# Allegro board L151_SHT30_V10A.brd
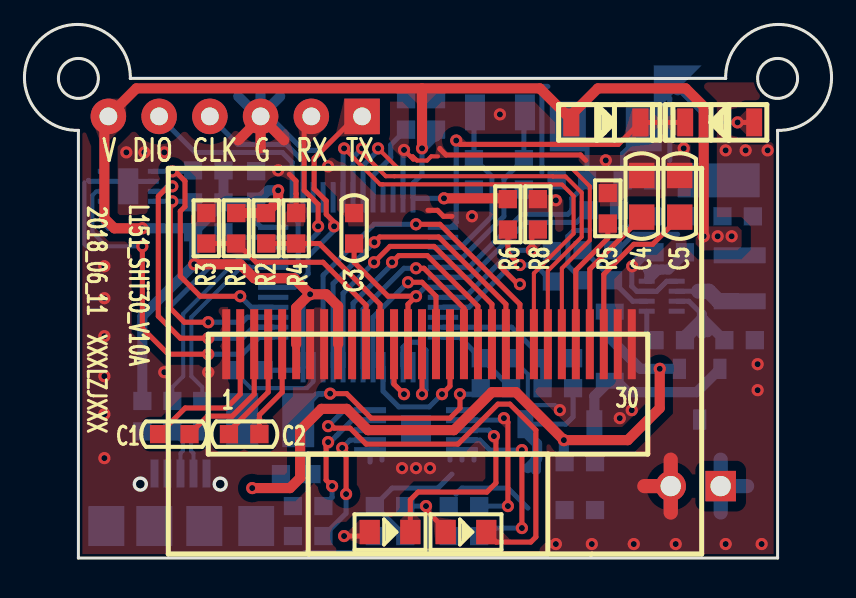
[diagram p0: board, top side]
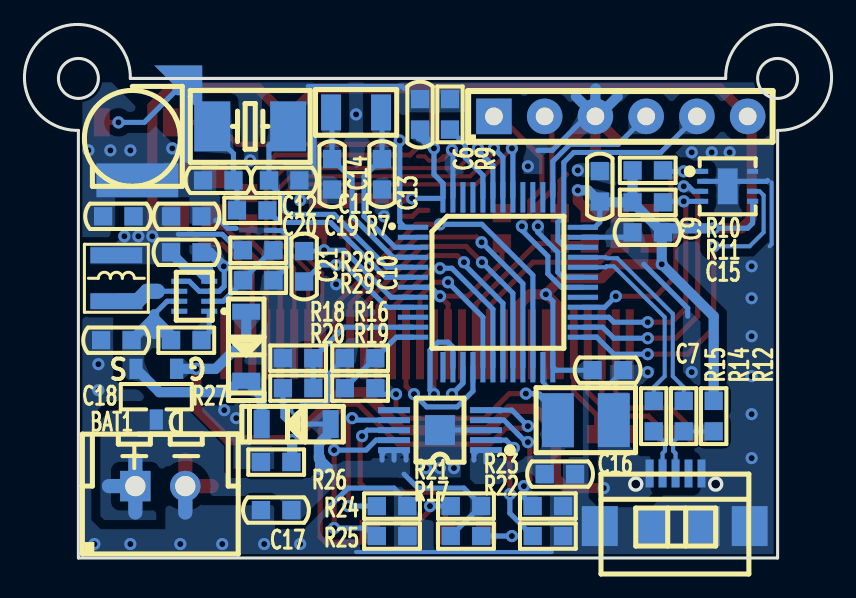
[diagram p1: board, bottom side, seen from below]

Outline 40.4 x 26.7 mm; copper layers: TOP, BOTTOM. Coordinates in mm from the lower left corner of the outline.
Outline path: circle c2.7,24 r1 ; circle c37.7,24 r1 ; 2.7,21.4 2.7,0 37.7,0 37.7,21.4 arc(39.63,25.92) 35.1,24 5.3,24 arc(0.78,25.92) 2.7,21.4

## Design rules (mm)
constraint set DEFAULT: min track width 0.203, pair gap 0.203
net group DP1: nets USB_D+ USB_D-
net group DP2: nets USB_DM USB_DP

## Placement (name value [footprint] x y rotation side)
BAT1  BATTERY  [XHB-2A]  33.6 3.6 180 bottom
C1  1uF_25V  [CC0603]  7.5 6.2 180 top
C2  1uF_25V  [CC0603]  11 6.2 0 top
C3  0.1uF_50V  [CC0603]  16.5 16.5 90 top
C4  10uF_25V  [CC0805]  30.9 18.1 90 top
C5  10uF_25V  [CC0805]  32.8 18.1 90 top
C6  0.1uF_50V  [CC0603]  20.6 22.2 270 bottom
C7  0.1uF_50V  [CC0603]  11.2 9.4 0 bottom
C9  0.1uF_50V  [CC0603]  11.6 18.6 270 bottom
C10  0.1uF_50V  [CC0603]  26.4 14.6 270 bottom
C11  20pF_50V  [CC0603]  27.4 18.9 0 bottom
C12  20pF_50V  [CC0603]  30.7 18.9 180 bottom
C13  12pF_50V  [CC0603]  22.5 19.2 90 bottom
C14  12pF_50V  [CC0603]  25 19.2 90 bottom
C15  0.1uF_50V  [CC0603]  9.2 16.3 0 bottom
C16  10uF_10V  [CC0603]  13.6 4.2 180 bottom
C17  10uF_10V  [CC0603]  27.8 2.4 0 bottom
C18  10uF_10V  [CC0603]  35.8 10.9 0 bottom
C19  10uF_10V  [CC0603]  32.3 17.1 180 bottom
C20  10uF_10V  [CC0603]  35.7 17.1 0 bottom
C21  0.1uF_50V  [CC0603]  32.3 15.3 180 bottom
D1  1N4148W-TP  [SOD-123]  27.5 21.8 0 top
D2  1N4148W-TP  [SOD-123]  36.4 21.8 180 top
D3  LED_RED  [LED0805]  18.3 1.3 0 top
D4  LED_GREEN  [LED0805]  22.1 1.3 0 top
D5  LMBR130FT1G  [SOD-123]  25.2 6.7 0 bottom
D6  LMBR130FT1G  [SOD-123]  29.3 12.2 270 bottom
F1  SMD1210-6V2A  [SMD-1210]  12.3 6.9 0 bottom
J2  -  [HEADER6X1_2R54]  16.9 22.1 180 bottom
L1  SWPA3015S2R2NT  [L3015]  35.8 14 90 bottom
NOREF  -  []  2.7 0 90 top
NOREF#2  -  []  0 24 0 top
Q1  AO3401A  [SOT23_GSD]  33.8 8.2 0 bottom
R1  10K  [RC0603]  10.6 16.5 90 top
R2  10K  [RC0603]  12.1 16.5 90 top
R3  10K/NI  [RC0603]  9.1 16.5 270 top
R4  10K/NI  [RC0603]  13.6 16.5 270 top
R5  760K  [RC0603]  29.2 17.5 270 top
R6  0R  [RC0603]  24.2 17.2 90 top
R7  390R  [RC0603]  29 17.4 180 bottom
R8  0R  [RC0603]  25.7 17.2 90 top
R9  10K  [RC0603]  19.1 22.2 90 bottom
R10  4.7K  [RC0603]  9.2 19.4 0 bottom
R11  4.7K  [RC0603]  9.2 17.8 0 bottom
R12  1.5K  [RC0603]  5.9 7.1 270 bottom
R14  22R  [RC0603]  7.4 7.1 270 bottom
R15  22R  [RC0603]  8.9 7.1 270 bottom
R16  200K  [RC0603]  23.6 10 180 bottom
R17  10K  [RC0603]  18.3 1.1 0 bottom
R18  200K  [RC0603]  26.7 10 180 bottom
R19  200K  [RC0603]  23.6 8.5 180 bottom
R20  200K  [RC0603]  26.7 8.5 0 bottom
R21  10K  [RC0603]  18.3 2.6 180 bottom
R22  540R  [RC0603]  14.2 1.1 180 bottom
R23  2K  [RC0603]  14.2 2.6 180 bottom
R24  10K  [RC0603]  22 2.6 180 bottom
R25  10K  [RC0603]  22 1.1 180 bottom
R26  100K  [RC0603]  27.8 4.8 0 bottom
R27  10K  [RC0603]  32.3 10.9 180 bottom
R28  200K  [RC0603]  28.7 15.4 180 bottom
R29  44.2K  [RC0603]  28.7 13.9 180 bottom
U1  -  [OLED_0R96]  7.2 0.2 0 top
U2  STM32F103C8T6  [LQFP-48]  16.7 13.8 180 bottom
U3  BATTERY_XH414  [BAT-XH414HG]  35 21 180 bottom
U4  SHT30-DIS-B  [DFN-8]  5.2 18.6 180 bottom
U6  BQ24090DGQR  [HVSSOP-10]  19.6 6.4 90 bottom
U7  MP2162GQH-Z  [QFN-8]  31.9 13.1 0 bottom
USB1  -  [USB-MICRO]  7.8 4.3 180 bottom
X1  X50328MSD2GC  [X-2P-5R0X3R2-SMD]  29.1 21.6 180 bottom
X2  XTAL_32768Hz_3215  [X-2P-3R2X1R5-SMD]  23.8 22.3 180 bottom

## Library data of the parts
BAT1 U3 = BATTERY
C1-C7 C9 C10 C16-C20 = CAP NP_2
C11-C15 C21 = CAP NP
D1 D2 = DIODE13_7
D3 D4 = LED_4
D5 D6 = DIODE13_0
F1 = FUSE
J2 = CONN RCPT 6
L1 = IND_BEAD_0805_600OHM_1
Q1 = MOS-P
R1-R12 R14-R29 = R_Generic
U1 = OLED_0
U2 = STM32F103C8T6
U4 = SHT30-DIS-B
U6 = BQ24090
U7 = MP2162GQH-Z
USB1 = USB-MICRO
X1 X2 = XTAL_5032_0

## Footprints (pads in the part's own frame, mm; a bottom-side part is the same pattern mirrored in y, then rotated)
BAT-XH414HG
  custom 2.4x2.4 smd: 1(2.3,2.45)
  rect 4.1x1.7 smd: 2(0.25,-2.1)
CC0603
  rect 0.914x0.914 smd: 1(-0.762,0) 2(0.762,0)
CC0805
  rect 1.27x1.27 smd: 1(-1.041,0) 2(1.041,0)
DFN-8
  rect 0.55x0.25 smd: 1(-1.25,0.75) 2(-1.25,0.25) 3(-1.25,-0.25) 4(-1.25,-0.75) 5(1.25,-0.75) 6(1.25,-0.25) 7(1.25,0.25) 8(1.25,0.75)
  rect 1x1.8 smd: 9(0,0)
HEADER6X1_2R54
  rect 1.778x1.778 hole 0.889: 1(0,0)
  round 1.778 hole 0.889: 2(2.54,0) 3(5.08,0) 4(7.62,0) 5(10.16,0) 6(12.7,0)
HVSSOP-10
  rect 0.3x1.6 smd: 1(-1,-2.3) 2(-0.5,-2.3) 3(0,-2.3) 4(0.5,-2.3) 5(1,-2.3) 6(1,2.3) 7(0.5,2.3) 8(0,2.3) 9(-0.5,2.3) 10(-1,2.3)
  rect 1.5x1.5 smd: 11(0,0)
L3015
  rect 0.8x2.6 smd: 1(-1.15,0) 2(1.15,0)
LED0805
  rect 1.016x1.219 smd: 1(-1.016,0) 2(1.016,0)
LQFP-48
  rect 1.52x0.25 smd: 1(-4.25,2.75) 2(-4.25,2.25) 3(-4.25,1.75) 4(-4.25,1.25) 5(-4.25,0.75) 6(-4.25,0.25) 7(-4.25,-0.25) 8(-4.25,-0.75) 9(-4.25,-1.25) 10(-4.25,-1.75) 11(-4.25,-2.25) 12(-4.25,-2.75) 25(4.25,-2.75) 26(4.25,-2.25) 27(4.25,-1.75) 28(4.25,-1.25) 29(4.25,-0.75) 30(4.25,-0.25) 31(4.25,0.25) 32(4.25,0.75) 33(4.25,1.25) 34(4.25,1.75) 35(4.25,2.25) 36(4.25,2.75)
  rect 0.25x1.52 smd: 13(-2.75,-4.25) 14(-2.25,-4.25) 15(-1.75,-4.25) 16(-1.25,-4.25) 17(-0.75,-4.25) 18(-0.25,-4.25) 19(0.25,-4.25) 20(0.75,-4.25) 21(1.25,-4.25) 22(1.75,-4.25) 23(2.25,-4.25) 24(2.75,-4.25) 37(2.75,4.25) 38(2.25,4.25) 39(1.75,4.25) 40(1.25,4.25) 41(0.75,4.25) 42(0.25,4.25) 43(-0.25,4.25) 44(-0.75,4.25) 45(-1.25,4.25) 46(-1.75,4.25) 47(-2.25,4.25) 48(-2.75,4.25)
OLED_0R96
  rect 0.4x3.5 smd: 1(2.9,10.5) 2(3.6,10.5) 3(4.3,10.5) 4(5,10.5) 5(5.7,10.5) 6(6.4,10.5) 7(7.1,10.5) 8(7.8,10.5) 9(8.5,10.5) 10(9.2,10.5) 11(9.9,10.5) 12(10.6,10.5) 13(11.3,10.5) 14(12,10.5) 15(12.7,10.5) 16(13.4,10.5) 17(14.1,10.5) 18(14.8,10.5) 19(15.5,10.5) 20(16.2,10.5) 21(16.9,10.5) 22(17.6,10.5) 23(18.3,10.5) 24(19,10.5) 25(19.7,10.5) 26(20.4,10.5) 27(21.1,10.5) 28(21.8,10.5) 29(22.5,10.5) 30(23.2,10.5)
QFN-8
  rect 0.8x0.25 smd: 1(-0.75,0.75) 2(-0.75,0.25) 3(-0.75,-0.25) 4(-0.75,-0.75) 5(0.75,-0.75) 6(0.75,-0.25) 7(0.75,0.25) 8(0.75,0.75)
RC0603
  rect 0.914x0.914 smd: 1(-0.762,0) 2(0.762,0)
SMD-1210
  rect 1.6x2.7 smd: 1(-1.4,0) 2(1.4,0)
SOD-123
  rect 0.8x1.4 smd: 1(-0.127,0) 2(3.327,0)
SOT23_GSD
  rect 0.66x1.016 smd: 1(-1.016,-1.27) 2(1.016,-1.27) 3(0,1.27)
USB-MICRO
  rect 0.4x1.4 smd: 1(-1.31,-0.07) 2(-0.66,-0.07) 3(-0.01,-0.07) 4(0.64,-0.07) 5(1.29,-0.07)
  rect 1.8x2 smd: 6(-3.8,-2.7) 7(-1.2,-2.7) 8(1.3,-2.7) 9(3.7,-2.7)
X-2P-3R2X1R5-SMD
  rect 1x1.8 smd: 1(-1.25,0) 2(1.25,0)
X-2P-5R0X3R2-SMD
  rect 1.8x2.5 smd: 1(-1.9,0) 2(1.9,0)
XHB-2A
  rect 1.524x1.524 hole 1.016: 1(-1.25,0)
  round 1.524 hole 1.016: 2(1.25,0)

## Nets
GND: BAT1.2 C3.2 C4.2 C5.2 C6.1 C7.1 C9.1 C11.1 C12.1 C13.1 C14.1 C15.2 C16.2 C17.2 C18.2 C19.2 C20.2 C21.2 J2.3 R3.1 R4.1 R5.1 R8.2 R9.2 R16.1 R18.1 R22.2 R23.2 R24.2 R25.2 R26.2 R29.2 U1.1 U1.7 U1.8(VSS) U1.29 U1.30 U2.23 U2.35 U2.47(VSS_3) U3.2 U4.2 U4.7 U4.8(VSS) U4.9 U6.3(VSS) U6.11 U7.3 U7.5 USB1.5 USB1.6 USB1.7 USB1.8 USB1.9
VBAT: D1.2(CATHODE) D2.2(CATHODE) U2.1
VCC_3.3V: C6.2 C7.2 C9.2 C15.1 C19.1 C20.1 C21.1 D1.1 J2.6 L1.2(B) R1.2 R2.2 R6.2 R10.2 R11.2 R12.1 R28.1 U1.6 U1.9 U2.24 U2.36 U2.48 U4.5 U7.4
VCC_BAT: BAT1.1 C17.1 D5.1 Q1.3 R17.2 R20.2 R21.2 U6.10
VCC_DCDC: C18.1 D5.2 D6.2 Q1.2(S) R27.1 U7.7(VIN)
VCC_USB: D6.1 F1.1 Q1.1 R26.1 USB1.1(VBUS)
VDDA: C10.2 R6.1 U2.9
VSSA: C10.1 R8.1 U2.8
ADC_BAT: R18.2 R20.1 U2.11
ADC_USB: R16.2 R19.1 U2.12
BAT_#CHG: D3.2(CATHODE) U6.8
BAT_#PG: D4.2(CATHODE) U6.5
BOOT0: R9.1 U2.44
BS1: R1.1 R3.2 U1.11
BS2: R2.1 R4.2 U1.12
OLED_CS: U1.13 U2.15
OLED_D0: U1.18 U2.18
OLED_D1: U1.19 U2.19
OLED_D2: U1.20 U2.20
OLED_D3: U1.21 U2.21
OLED_D4: U1.22 U2.22
OLED_D5: U1.23 U2.41
OLED_D6: U1.24 U2.42
OLED_D7: U1.25 U2.43
OLED_DC: U1.15 U2.14
OLED_RD: U1.17 U2.16
OLED_RW: U1.16 U2.17
OSC32_IN: C13.2 U2.3 X2.2
OSC32_OUT: C14.2 U2.4 X2.1
OSC_IN: C11.2 U2.5 X1.2
OSC_OUT: R7.2 U2.6
RESET: C3.1 U1.14 U2.7
SHT30_ALERT: U2.26 U4.3
SHT30_RST: U2.25 U4.6
SHT30_SCL: R11.1 U2.27 U4.4
SHT30_SDA: R10.1 U2.28 U4.1
SWCLK: J2.4 U2.37
SWDIO: J2.5 U2.34
USART1_RX: J2.2 U2.31
USART1_TX: J2.1 U2.30
USB_D+: R12.2 R14.2 USB1.3
USB_D-: R15.2 USB1.2
USB_DM: R15.1 U2.32
USB_DP: R14.1 U2.33
N16868433: C1.2 U1.2
N16868440: C1.1 U1.3
N16868466: C2.2 U1.5
N16868469: C2.1 U1.4
N16869084: R5.2 U1.26
N16872457: C5.1 U1.28
N16873068: C4.1 U1.27
N16896642: C12.2 R7.1 X1.1
N16906184: D3.1 R17.1
N16906254: D4.1 R21.1
N16906301: C16.1 F1.2 R19.2 U6.1
N16906345: R22.1 U6.2
N16906349: R25.1 U6.9
N16906367: R23.1 U6.4
N16906371: R24.1 U6.7
N16907895: R27.2 U7.1
N16907905: R28.2 R29.1 U7.2
N16907925: L1.1 U7.6
N169035110: D2.1 U3.1

Pads without a net: U1 10; U2 2 10 13 29 38 39 40 45 46; U6 6; U7 8; USB1 4

## Via types
v1: diameter 0.61, hole 0.305, TOP to BOTTOM, 91 vias

## Routing (per net, layer and track width the routed paths; a pad name or vN(x,y) marks a point on that pad's centre or on a via; arc(x,y) is an arc through that point)
GND: length 96.9
  TOP w0.203: 20.7,20.1 20.37,20.1 20.16,19.89 19.65,19.89 19.6,19.94 ; 19.6,19.94 19.44,20.1 19.33,20.1 v1(19,20.42) 19,20.4 19.46,19.94 19.6,19.94
  TOP w0.254: v1(24.8,13.7) 24.7,13.7 23.8,14.6 ; 28.1,19.9 27.83,20.17 21.1,20.17 20.8,20.47 20.8,20.5 ; R4.1 13.6,18.23 13.6,18.23 13.6,18.87 13.26,19.2 ; 21.4,17.1 20.98,17.1 20.68,17.4 20.2,17.4
  TOP w0.508: 11.82,22.08 11.82,22.02 ; 11.82,22.08 13,20.9 ; 11.82,22.08 J2.3 ; 11.82,22.02 10.7,20.9 ; 11.82,22.02 11.82,20.52 11.8,20.5
  TOP w0.711: 32.35,2.28 BAT1.2 ; BAT1.2 32.35,4.92 ; BAT1.2 31.03,3.6
  BOTTOM w0.203: 3.1,15.6 3,15.7 3,18.8 ; R16.1 24.4,10 25.2,9.2 25.2,7.85 25.4,7.65 26.55,7.65 v1(26.8,7.4) ; U2.23 14.45,8.81 14.15,8.5 12.21,8.5 ; 12.2,8.5 12.21,8.5 ; 12.21,8.5 11.34,8.5 C7.1 ; 14,0.3 23.8,0.3
  BOTTOM w0.254: 32.3,19.9 32.3,23 31.9,23.4 ; 26.2,23.6 21.5,23.6 21.4,23.5 ; 14.7,20.4 13.98,20.4 12.28,22.1 J2.3 ; 26,23.5 25.9,23.4 25.9,19.3 ; R29.2 27.2,14.64 27.2,16.1 27.49,16.39 27.8,16.39 27.82,16.4 28.3,16.4 ; v1(19,20.42) 19,20.4 18.95,20.35 U2.47 ; U7.5 32.15,13.85 31.65,13.35 U7.3 30.65,13.35 30.4,13.6 30.4,14.58 v1(30.43,14.6) ; 30.83,16.9 30.63,16.9 30.23,16.5 29.8,16.5 ; 9.4,14.7 7.2,12.5 7.2,12.1 ; 25.2,2.5 24.2,3.5 21.9,3.5 21.6,3.2 ; U4.2 5.45,18.85 U4.9 4.95,18.85 U4.7 3.25,18.85 3.2,18.9 ; U2.35 10.22,16.05 C15.2 ; U6.3 U6.11
  BOTTOM w0.508: 11.82,22.12 12.8,23.1 ; 11.82,22.12 J2.3 11.7,22.1 10.7,23.1 ; 11.82,22.12 11.82,23.48 11.8,23.5 ; v1(30.43,14.6) 30.43,14.6 31.13,15.3 C21.2
  BOTTOM w0.711: 32.35,2.28 BAT1.2
  vias: v1(4,14.6) v1(4,13) v1(4,11.1) v1(4,9.1) v1(4,7.2) v1(4,5) v1(5.1,20.3) v1(6,20.3) v1(7,20.3) v1(7,9.3) v1(9.2,9.3) v1(12.7,19.4) v1(15.2,19.6) v1(18.9,4.5) v1(19.6,4.5) v1(20.3,4.5) v1(22.4,17.1) v1(23.8,22.2) v1(26.6,17.9) v1(26.6,0.7) v1(28.4,0.7) v1(29.1,19.9) v1(29.8,7) v1(30.4,7.4) v1(30.5,0.7) v1(32.6,0.7) v1(33,20.5) v1(35.1,20.4) v1(35.1,0.7) v1(36.1,20.4) v1(36.7,9.7) v1(36.7,8.4) v1(36.9,0.7) v1(37.2,20.4)
VBAT: length 16.9
  TOP w0.254: v1(21.62,20.89) 21.81,20.7 29.73,20.7 D1.2 33.08,21.8
  BOTTOM w0.254: U2.1 21.36,16.55 21.62,16.8 21.62,17.71 21.64,17.74 21.64,18.26 21.62,18.29 v1(21.62,20.89)
VCC_3.3V: length 111.4
  TOP w0.508: 19.9,23.5 25.8,23.5 27.38,21.93 ; 19.9,23.5 5.6,23.5 J2.6 4,21.9 4,17 4.5,16.5 v1(5.9,16.5) ; 19.9,23.5 v1(19.9,20.5) ; v1(14.3,13.2) 14.28,13.2 13.6,12.52 U1.6 ; v1(14.3,13.2) 13.5,14 11.5,14 10.8,14.7 v1(8.5,14.7) ; v1(14.3,13.2) 15.1,13.2 15.7,12.6 U1.9 ; v1(21,18) 24.17,18 R6.2 ; v1(12.7,18.4) 12.7,17.86 R2.2 R1.2 ; v1(34,16.1) 34,22.6 33.1,23.5 28.7,23.5 27.38,22.17 27.38,21.93 ; 27.38,21.93 D1.1
  BOTTOM w0.254: v1(5.9,16.5) 4.21,16.5 3.95,16.75 U4.5 ; 31.15,13.99 U7.4 31.32,13.85 31.9,14.44 ; 31.15,13.99 31.6,14.44 ; 31.15,13.99 31.15,14.39 31.2,14.44 ; v1(19.9,20.5) 19.9,19.2 19.45,18.75 U2.48 19.5,18 v1(21,18) ; R28.1 29.7,15.4 30.5,16.2 32.7,16.2 ; C9.2 11.6,16.8 11.86,16.55 U2.36 ; v1(14.3,13.2) 13.95,12.85 U2.24 13.8,9.4 C7.2
  BOTTOM w0.508: R12.1 5.9,12.1 v1(8.5,14.7) 8.5,16.24 C15.1 ; C15.1 8.24,16.5 v1(5.9,16.5) ; C15.1 8.47,16.3 R11.2 ; R11.2 11.57,17.8 C9.2 11.64,17.84 12.2,18.4 v1(12.7,18.4) ; R11.2 R10.2 ; v1(19.9,20.5) 20.5,21.1 20.6,21.1 C6.2 ; 31.2,14.44 32.24,14.44 33.07,15.26 C21.1
  vias: v1(34.7,16.1) v1(35.4,16.1)
VCC_BAT: length 20.4
  BOTTOM w0.254: D5.1 27.1,6.7 27.47,7.06 R20.2 ; R17.2 17.57,2.6 R21.2 17.54,2.64 18.4,3.5 20.7,3.5 21.4,4.2 ; 22.5,4.9 22.5,5.2 22.3,5.4 U6.10 ; U6.10 21.5,5.4 21.3,5.2 21.3,4.9 ; U6.10 21.9,4.9
  BOTTOM w0.508: 25.2,4.5 25.67,4.96 25.67,5.08 ; 25.67,5.08 25.6,5.02 25.6,4.4 ; 25.67,5.08 25.67,5.72 25.08,6.3 D5.1
  BOTTOM w0.711: BAT1.1 34.85,4.92 ; BAT1.1 34.85,2.28 ; BAT1.1 36.18,3.6
VCC_DCDC: length 15.8
  BOTTOM w0.254: U7.7 33.26,12.85 33.91,12.2
  BOTTOM w0.508: 33.91,12 33.94,12 C18.1 ; 33.91,12 33.07,11.15 R27.1 33.76,11.59 33.91,11.59 ; 33.91,12 33.91,11.59 ; 33.91,12 33.91,12.2 ; D5.2 28.53,8.1 D6.2 29.63,8.87 30.2,8.3 33.65,8.3 Q1.2 ; 33.91,11.59 34.2,11.3 ; 33.91,11.59 33.91,11.21
VCC_USB: length 34.9
  TOP w0.508: v1(31.8,9.47) 31.8,7.5 30.2,5.9 v1(27,5.9) 24.6,8.3 23.4,8.3 21.5,6.4 17.2,6.4 16.14,7.46 14.87,7.46 13.8,6.4 13.8,4.01 13.3,3.5 v1(11.4,3.5)
  BOTTOM w0.508: R26.1 27,4.84 v1(27,5.9) ; Q1.1 v1(31.8,9.47) 30.83,9.47 29.3,11 D6.1
VDDA: length 8.7
  TOP w0.254: R6.1 24.2,15.26 v1(24.8,14.66)
  BOTTOM w0.254: C10.2 25.58,14.66 v1(24.8,14.66) 24.37,14.66 22.25,12.55 U2.9
VSSA: length 7.6
  TOP w0.254: R8.1 25.4,16.14 v1(25.4,15.4)
  BOTTOM w0.254: C10.1 25.44,15.36 v1(25.4,15.4) 24.4,15.4 22.05,13.05 U2.8
ADC_BAT: length 7.1
  BOTTOM w0.254: R20.1 R18.2 24.39,11.55 U2.11
ADC_USB: length 4.5
  BOTTOM w0.254: U2.12 21.79,11.05 R16.2 22.87,10 R19.1
BAT_#CHG: length 10.4
  TOP w0.254: D3.2 19.32,2.92 19.7,3.3 23.15,3.3 23.6,3.75 23.6,6 v1(23.5,6.1)
  BOTTOM w0.254: v1(23.5,6.1) 23.5,6.15 23.25,6.4 U6.8
BAT_#PG: length 22.7
  TOP w0.254: D4.2 23.62,0.8 25.35,0.8 25.6,1.05 25.6,6.4 24.3,7.7 23.7,7.7 21.7,5.7 17.1,5.7 16.3,6.5 15.5,6.5 15.4,6.6 v1(15.2,6.6)
  BOTTOM w0.254: U6.5 16,7.4 v1(15.2,6.6)
BOOT0: length 4.1
  BOTTOM w0.254: R9.1 18.34,20.67 18.34,20.04 17.45,19.15 U2.44
BS1: length 11.2
  TOP w0.254: U1.11 17.1,12.65 14.95,14.8 11.6,14.8 10.67,15.74 R1.1 R3.2
BS2: length 9
  TOP w0.254: R2.1 R4.2 14.77,15.74 17.8,12.7 U1.12
OLED_CS: length 4.3
  TOP w0.254: v1(19,8.2) 18.5,8.7 U1.13
  BOTTOM w0.254: v1(19,8.2) 18.45,8.75 U2.15
OLED_D0: length 11.4
  TOP w0.254: U1.18 22,12.5 20,14.5 v1(19.6,14.5)
  BOTTOM w0.254: v1(19.6,14.5) 19,14.5 16.95,12.45 U2.18
OLED_D1: length 13.4
  TOP w0.254: v1(18.4,14.8) 18.74,15.13 20.17,15.13 22.7,12.6 U1.19
  BOTTOM w0.254: v1(18.4,14.8) 18.4,14.7 16.45,12.75 U2.19
OLED_D2: length 15.3
  TOP w0.254: U1.20 23.4,12.7 20.51,15.59 18.3,15.59 v1(17.5,14.8)
  BOTTOM w0.254: U2.20 15.95,13.25 v1(17.5,14.8)
OLED_D3: length 17.2
  TOP w0.254: U1.21 24.1,12.7 20.74,16.07 17.79,16.07 v1(17.52,15.8)
  BOTTOM w0.254: v1(17.52,15.8) 15.45,13.73 U2.21
OLED_D4: length 19.2
  TOP w0.254: U1.22 24.8,12.7 20.8,16.7 v1(19.6,16.7)
  BOTTOM w0.254: v1(19.6,16.7) 17.5,16.7 14.95,14.15 U2.22
OLED_D5: length 23.2
  TOP w0.203: U1.23 25.5,14.25 27.49,16.24 27.49,18.11 26.92,18.69 26.29,18.69 26.28,18.7 17.92,18.7 17.92,18.7 17.8,18.7 v1(16,20.5)
  BOTTOM w0.254: v1(16,20.5) 16,20.4 15.95,20.35 U2.41
OLED_D6: length 23
  TOP w0.203: U1.24 26.2,14.37 27.9,16.07 27.9,18.28 27.09,19.09 26.46,19.09 26.45,19.11 18.52,19.11 18.52,19.11 18.09,19.11 16.9,20.29 v1(16.9,20.5)
  BOTTOM w0.254: U2.42 16.45,20.05 v1(16.9,20.5)
OLED_D7: length 22.6
  TOP w0.203: v1(17.7,20.5) 18.69,19.51 26.61,19.51 26.63,19.5 27.4,19.5 28.3,18.6 28.3,15.9 26.9,14.5 U1.25
  BOTTOM w0.254: U2.43 16.95,19.65 17.7,20.4 v1(17.7,20.5)
OLED_DC: length 7.2
  TOP w0.254: U1.15 v1(19.9,8.2)
  BOTTOM w0.254: U2.14 18.95,10.55 19.2,10.8 19.7,10.8 20.1,10.4 20.1,8.4 v1(19.9,8.2)
OLED_RD: length 7.4
  TOP w0.254: U1.17 21.3,8.6 v1(20.9,8.2)
  BOTTOM w0.254: v1(20.9,8.2) 20.27,7.57 18.74,7.57 17.95,8.35 U2.16
OLED_RW: length 9.1
  TOP w0.254: U1.16 20.6,13.1 19.9,13.8 v1(19.2,13.8)
  BOTTOM w0.254: v1(19.2,13.8) 17.45,12.05 U2.17
OSC32_IN: length 8.7
  BOTTOM w0.254: X2.2 22.5,22.25 C13.2 22.54,19.96 23.4,19.1 23.4,17.1 21.85,15.55 U2.3
OSC32_OUT: length 9.5
  BOTTOM w0.254: U2.4 21.95,15.05 24,17.1 24,18.96 C14.2 25,22.25 X2.1
OSC_IN: length 12.5
  BOTTOM w0.254: X1.2 28.17,20.64 C11.2 28.17,18.76 27.4,18 27.4,17.4 27.2,17.2 24.9,17.2 22.25,14.55 U2.5
OSC_OUT: length 8.7
  BOTTOM w0.254: R7.2 27.64,16.79 25.07,16.79 22.33,14.05 U2.6
RESET: length 8.8
  TOP w0.254: U1.14 19.2,12.7 v1(19.6,13.1) 18.2,13.1 16.5,14.8 C3.1
  BOTTOM w0.254: U2.7 20.05,13.55 v1(19.6,13.1)
SHT30_ALERT: length 14.4
  TOP w0.254: v1(9.2,11) 7.8,11 6.7,12.1 6.7,18.1 7.2,18.6 v1(7.4,18.6)
  BOTTOM w0.254: U2.26 11.45,11.55 10.9,11 v1(9.2,11) ; U4.3 6.9,18.35 7.15,18.6 v1(7.4,18.6)
SHT30_RST: length 16.8
  TOP w0.254: v1(9.2,10.2) 7.2,10.2 5.9,11.5 v1(5.9,15.6)
  BOTTOM w0.203: v1(5.9,15.6) 4.1,15.6 3.4,16.3 3.4,18.15 3.61,18.35 U4.6
  BOTTOM w0.254: U2.25 11.75,11.05 10.9,10.2 v1(9.2,10.2)
SHT30_SCL: length 12.9
  TOP w0.254: v1(9.2,11.8) 8,11.8 7.3,12.5 7.3,17.75 v1(7.4,17.85)
  BOTTOM w0.254: U4.4 v1(7.4,17.85) 8.39,17.85 R11.1 ; v1(9.2,11.8) 10.9,11.8 11.15,12.05 U2.27
SHT30_SDA: length 13
  TOP w0.254: v1(7.4,19.35) 7.55,19.35 8.04,18.86 8.04,17.59 7.8,17.35 7.8,14.1 8.8,13.1 v1(10.8,13.1)
  BOTTOM w0.254: U4.1 v1(7.4,19.35) 8.39,19.35 R10.1 ; v1(10.8,13.1) 11.35,12.55 U2.28
SWCLK: length 7.4
  BOTTOM w0.254: J2.4 10.68,20.7 13.1,20.7 13.95,19.85 U2.37
SWDIO: length 13
  BOTTOM w0.254: U2.34 13.35,15.55 13.7,15.9 13.7,16.8 13.4,17.1 13.4,19.8 12.91,20.29 8.55,20.29 J2.5
USART1_RX: length 10
  TOP w0.254: J2.2 14.36,22.06 14,21.7 14,18.4 14.7,17.7 v1(14.7,16.6)
  BOTTOM w0.254: U2.31 13.45,14.05 13.7,14.3 13.7,15.3 14.7,16.3 v1(14.7,16.6)
USART1_TX: length 12
  TOP w0.254: v1(15.5,16.6) 15.5,16.81 15.11,17.2 15.11,17.87 14.5,18.47 14.5,20 16.6,22.1 J2.1
  BOTTOM w0.254: U2.30 13.53,13.55 14.2,14.23 14.2,15.1 15.5,16.4 v1(15.5,16.6)
USB_D+: length 3.9
  BOTTOM w0.203: USB1.3 7.81,5.24 7.94,5.36 7.94,5.81 R14.2 R12.2
USB_D-: length 2.4
  BOTTOM w0.203: USB1.2 8.46,5.24 8.34,5.36 8.34,5.78 R15.2
USB_DM: length 9.6
  BOTTOM w0.203: R15.1 8.9,8.55 8.36,9.09 8.36,12.05 10.9,14.6 11.26,14.6 11.31,14.55 U2.32
USB_DP: length 10.3
  BOTTOM w0.203: U2.33 11.31,15.05 11.26,15 10.73,15 7.95,12.22 7.95,9.09 7.4,8.55 R14.1
N16868433: length 7.4
  TOP w0.254: U1.2 10.8,8.2 10.11,7.51 8.05,7.51 C1.2
N16868440: length 6.6
  TOP w0.254: U1.3 11.5,8.2 10.4,7.1 9.17,7.1 C1.1
N16868466: length 5
  TOP w0.254: C2.2 11.77,7.16 12.9,8.3 U1.5
N16868469: length 5.3
  TOP w0.254: U1.4 12.2,8.3 10.24,6.34 C2.1
N16869084: length 6.7
  TOP w0.254: U1.26 27.6,14.4 29.2,16 R5.2
N16872457: length 8.5
  TOP w0.254: C5.1 31.45,15.7 30.5,15.7 29,14.2 U1.28
N16873068: length 7.4
  TOP w0.254: C4.1 28.3,14.46 U1.27
N16896642: length 4.7
  BOTTOM w0.254: X1.1 31,21.3 29.94,20.24 C12.2 29.77,18.72 R7.1
N16906184: length 2.9
  TOP w0.254: D3.1 17.09,1.1 v1(16,1.1)
  BOTTOM w0.254: R17.1 v1(16,1.1)
N16906254: length 2.7
  TOP w0.254: D4.1 21.09,1.42 20.1,2.4 v1(20.1,2.6)
  BOTTOM w0.254: v1(20.1,2.6) R21.1
N16906301: length 14.7
  TOP w0.254: v1(21.8,8.2) 21.8,7.5 21.3,7 17.36,7 16.13,8.23 v1(15.3,8.23)
  BOTTOM w0.254: 13.7,7.2 13.7,7.3 14.6,8.2 14.9,8.2 14.93,8.23 ; 13.7,7.2 14.73,8.23 14.93,8.23 ; 13.7,7.2 F1.2 ; 14.93,8.23 v1(15.3,8.23) ; 17.9,4.9 17.9,5.2 17.7,5.4 U6.1 17.3,4.8 ; v1(21.8,8.2) 22.54,8.2 R19.2
N16906345: length 6.5
  TOP w0.254: v1(15.91,5.51) 15.91,5.49 16.1,5.29 v1(16.1,3.2)
  BOTTOM w0.254: R22.1 16.1,2.24 v1(16.1,3.2) ; U6.2 16.3,5.9 15.95,5.55 v1(15.91,5.51)
N16906349: length 9.4
  TOP w0.254: v1(24.9,5.4) v1(24.9,1.5)
  BOTTOM w0.254: v1(24.9,5.4) 23.3,5.4 22.8,5.9 U6.9 ; R25.1 22.9,1.1 23.3,1.5 v1(24.9,1.5)
N16906367: length 6.1
  TOP w0.254: v1(15.4,3.6) 15.1,3.9 15.1,5.7 v1(15.2,5.8)
  BOTTOM w0.254: U6.4 16.4,6.9 15.74,6.24 15.74,6.24 15.65,6.14 15.3,5.8 v1(15.2,5.8) ; v1(15.4,3.6) 15.4,3.04 R23.1
N16906371: length 8.1
  TOP w0.254: v1(24,7) 24.2,6.8 v1(24.2,2.6)
  BOTTOM w0.254: v1(24,7) 23.9,6.9 U6.7 ; R24.1 v1(24.2,2.6)
N16907895: length 1.6
  BOTTOM w0.254: R27.2 31.15,11.29 U7.1
N16907905: length 4.3
  BOTTOM w0.254: R28.2 28,15.4 29.47,13.94 R29.1 29.47,13.84 30.45,12.85 U7.2
N16907925: length 3.4
  BOTTOM w0.254: 33.75,13.35 U7.6
  BOTTOM w0.762: 33.75,13.35 34.25,13.35 34.75,12.85 L1.1
N169035110: length 4.5
  TOP w0.254: D2.1 v1(35.7,21.8)
  BOTTOM w0.254: U3.1 32.75,23.45 34.4,21.8 v1(35.7,21.8)

## Copper pours and planes (outline as drawn; the poured copper is in the pictures)
VCC_3.3V on TOP: 33.9,15.4 35.7,15.4 35.9,15.6 35.9,16.4 35.7,16.6 33.9,16.6 33.6,16.3 33.6,15.7
VCC_3.3V on BOTTOM: 37.1,14.7 32.7,14.7 32.6,14.8 32.6,17.6 35.4,17.6 35.4,16.2 36,15.6 37.1,15.6
VCC_BAT on BOTTOM: 26.6,1.9 24.5,4 21.3,4 21.1,4.2 21.1,5 22.9,5 22.9,5.6 24.5,5.6 26.1,4 30.1,4 30.4,4.3 30.4,5.6 32.2,7.4 36.1,7.4 36.6,6.9 36.6,2.1 36.4,1.9 33.8,1.9 33.8,4.1 33.3,4.6 31.8,4.6 31.4,4.2 31.4,3.2 31.3,3.1 27.8,3.1 27.4,2.7 27.4,1.9
VCC_DCDC on BOTTOM: 32.6,11.4 35.5,11.4 35.5,9.2 35.2,8.9 34.4,8.9 34.4,10.1 34,10.5 32.6,10.5
VCC_USB on BOTTOM: 10.1,8.2 10.1,5.6 9.6,5.1 8.9,5.1 8.9,3.3 9.2,3 11.5,3 11.7,3.2 11.7,8.3 10.2,8.3
N16906301 on BOTTOM: 12.9,8.3 14.6,8.3 14.6,5.8 14.8,5.6 16.2,5.6 16.2,5 18.1,5 18.1,3.8 18,3.7 13.9,3.7 13.9,4.9 13.3,5.5 12.9,5.5
GND on TOP: 36.51,23.8 36.85,23.15 37.5,22.81 37.5,0.2 2.9,0.2 2.9,22.74 3.6,23.1 3.96,23.8 ; 6 cut-outs
GND on BOTTOM: 2.9,0.2 2.9,22.81 3.55,23.15 3.89,23.8 36.51,23.8 36.85,23.15 37.5,22.81 37.5,0.2 ; 8 cut-outs

Small or netless copper shapes (teardrops, artwork), in the pictures only: 61 on TOP, 122 on BOTTOM

## Text on the board
Ref Des/Silkscreen Top: 2018_06_11  XXXLZJXXX | L151_SHT30_V10A | V | DIO | CLK | G | RX | TX
DEVICE_TYPE_BOTTOM: FIGURE | FINISHED_SIZE | 0.3048 | 0.889 | 1.016 | DRILL CHART: TOP to BOTTOM | ALL UNITS ARE IN MILLIMETERS | PLATED | QTY | 91 | 6 | 2
